# EAGLE board Analog (EAGLE 6.1)

Size 62.21 x 66.98 mm. Coordinates in mm from the lower left corner, seen from the top.
Outline: 0,0 62.21,0 62.21,66.98 0,66.98 0,0
Copper layers (1*16): Top 0.035mm / dielectric 1.5mm / Bottom 0.035mm
Design rules: minimum track width 10mil, minimum drill 24mil, track to track 8mil, track to pad 8mil, pad to pad 8mil, via to via 8mil, smd to smd 8mil, copper to edge 40mil, drill to drill 8mil, minimum pad ring 10mil, minimum via ring 8mil, stop-mask expansion 4mil, vias tented up to drill 0mil, thermal gap 10mil

## Footprints (pad centres in the part's own frame; a part is rotated, then mirrored left to right if it is on the bottom)
153CLV-0405 = smd 2.6 x 1.6: + 1.8,0; - -1.8,0
DO35-7 = drill 0.813 long: A 3.81,0; C -3.81,0
DO41-10 = drill 1.118: A 5.08,0; C -5.08,0
SOD-123_MINI-SMA = smd 1.5 x 2.1: A 1.8,0; C -1.8,0
G5LE = drill 1.321 long: 1 -7.493,-5.969; 2 -7.493,5.969; O 4.699,5.969; P -9.525,0; S 4.699,-5.969
TO92-EBC = drill 0.813 long: B 0,-1.27; C 2.54,-1.27; E -2.54,-1.27
SOT223 = smd 1.219 x 2.235: 1 -2.311,-3.099; 2 0,-3.099; 3 2.311,-3.099 | smd 3.6 x 2.2: 4 0,3.099
TO-263-5 = smd 1 x 3: 1 1.68,2.16; 2 3.38,2.16; 3 5.08,2.16; 4 6.78,2.16; 5 8.48,2.16 | smd 11 x 8: TAB 5.08,13.335

## Placement (x,y rotation side)
C1  100uF  [153CLV-0405]  43.18,40.64 0 top
C2  330uF  [153CLV-0405]  35.56,40.64 0 top
D1  1N4148DO35-7  [DO35-7]  44.45,57.15 0 top
D2  1N4148DO35-7  [DO35-7]  26.67,57.15 0 top
D3  1N4148DO35-7  [DO35-7]  8.89,57.15 0 top
D4  1N4004  [DO41-10]  49.53,49.53 0 top
D5  1N4004  [DO41-10]  36.83,49.53 0 top
D6  1N4004  [DO41-10]  24.13,49.53 0 top
D7  1N4004  [DO41-10]  11.43,49.53 0 top
D8  CGRM4001-G  [SOD-123_MINI-SMA]  45.72,63.5 0 top
K1  G5LE  [G5LE]  29.21,8.89 0 top
K2  G5LE  [G5LE]  41.91,27.94 0 top
K3  G5LE  [G5LE]  15.24,27.94 0 top
T1  [TO92-EBC]  27.94,40.64 0 top
T2  [TO92-EBC]  20.32,40.64 0 top
T3  [TO92-EBC]  12.7,40.64 0 top
VREG-3.3  [SOT223]  52.07,40.64 0 top
VREG-5  TL2575-05  [TO-263-5]  44.45,1.27 0 top

## Library data of the parts
C1 C2 = rcl
D1-D8 = diode
K1-K3 = relay; OC_FARNELL: unknown; OC_NEWARK: unknown
T1-T3 = transistor-neu-to92
VREG-3.3 = linear-technology; MPN: LT1129CST-5#PBF; OC_FARNELL: 1663375; OC_NEWARK: 57M2069
VREG-5 = texas

## Nets
3.3+: VREG-3.3.3
5V+: C2.+ D1.C D2.C D3.C K1.1 K2.1 K3.1 VREG-3.3.1 VREG-5.4
5V-: C1.- C2.- D6.A D7.A D8.A VREG-3.3.2 VREG-5.3 VREG-5.5 VREG-5.TAB
AC: T2.B
FAN: T1.B
GND: T1.E T2.E T3.E VREG-3.3.4
HEAT: T3.B
N$1: C1.+ D4.C D5.C VREG-5.1
N$2: D1.A K3.2 T1.C
N$3: D2.A K2.2 T2.C
N$4: D8.C VREG-5.2
N$5: D3.A K1.2 T3.C
VAC+: D5.A D7.C
VAC-: D4.A D6.C K1.O K1.P K2.O K2.P K3.O K3.P

## Tracks (layer width: path | path; a pad name or v marks a point on that pad's centre or on a via)
5V+  (8 unrouted)
5V-  (8 unrouted)
GND  (3 unrouted)
N$1  (3 unrouted)
N$2  (2 unrouted)
N$3  (2 unrouted)
N$4  (1 unrouted)
N$5  (2 unrouted)
VAC+  (1 unrouted)
VAC-  (7 unrouted)